# EAGLE board Arduino Portable (EAGLE 5.11)
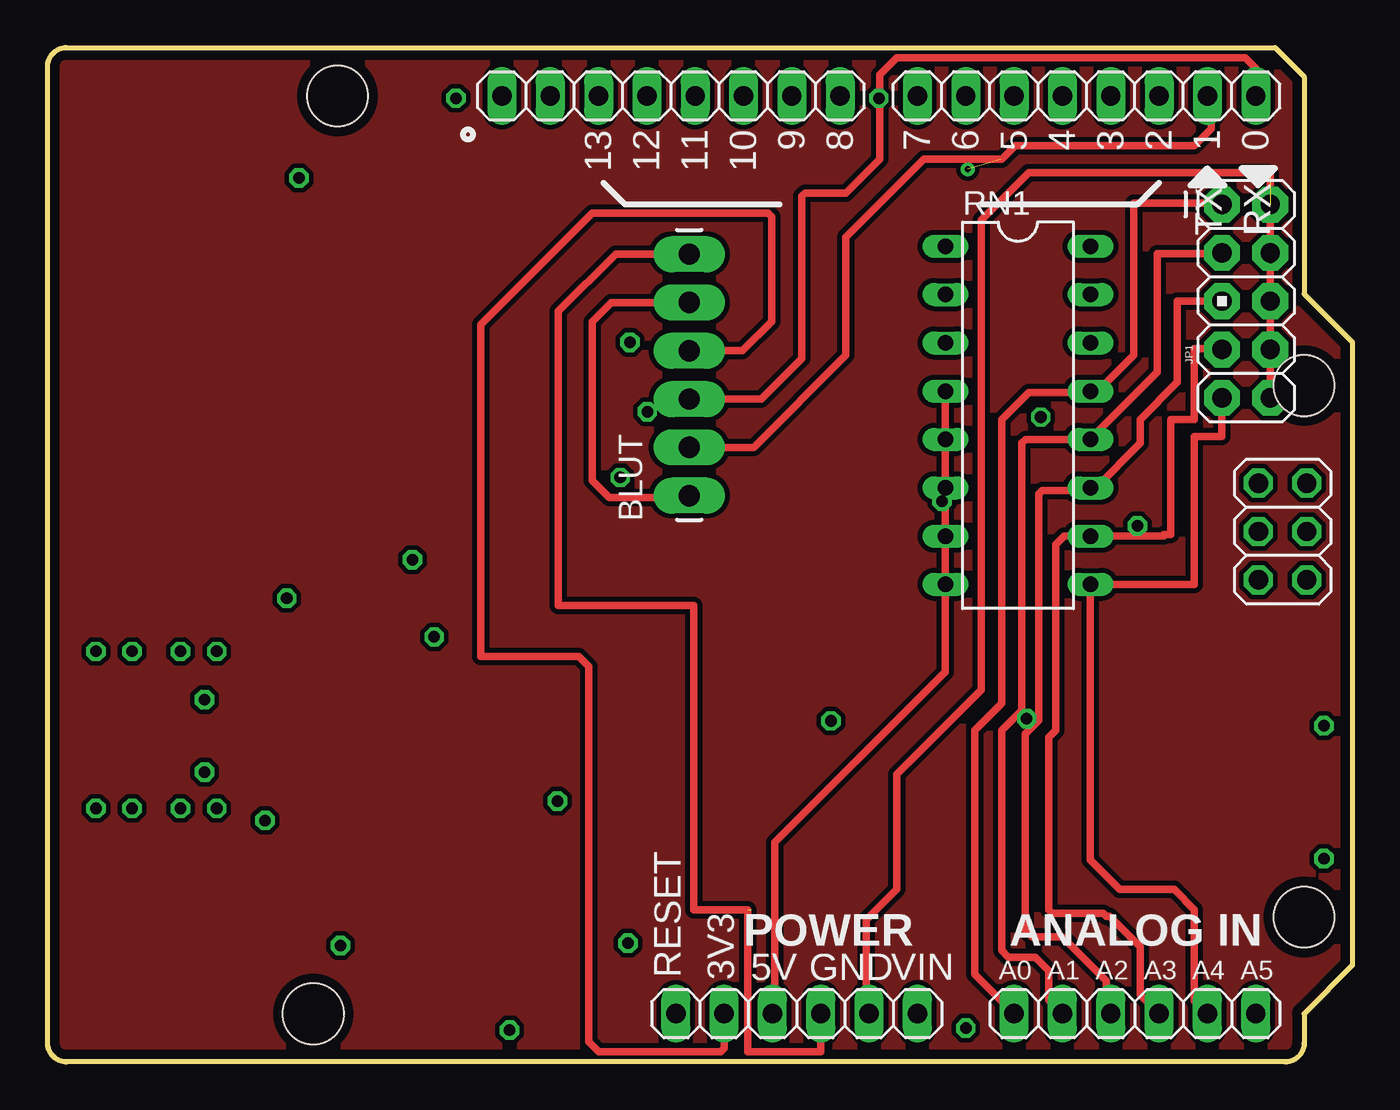
[diagram p0: board, top side]
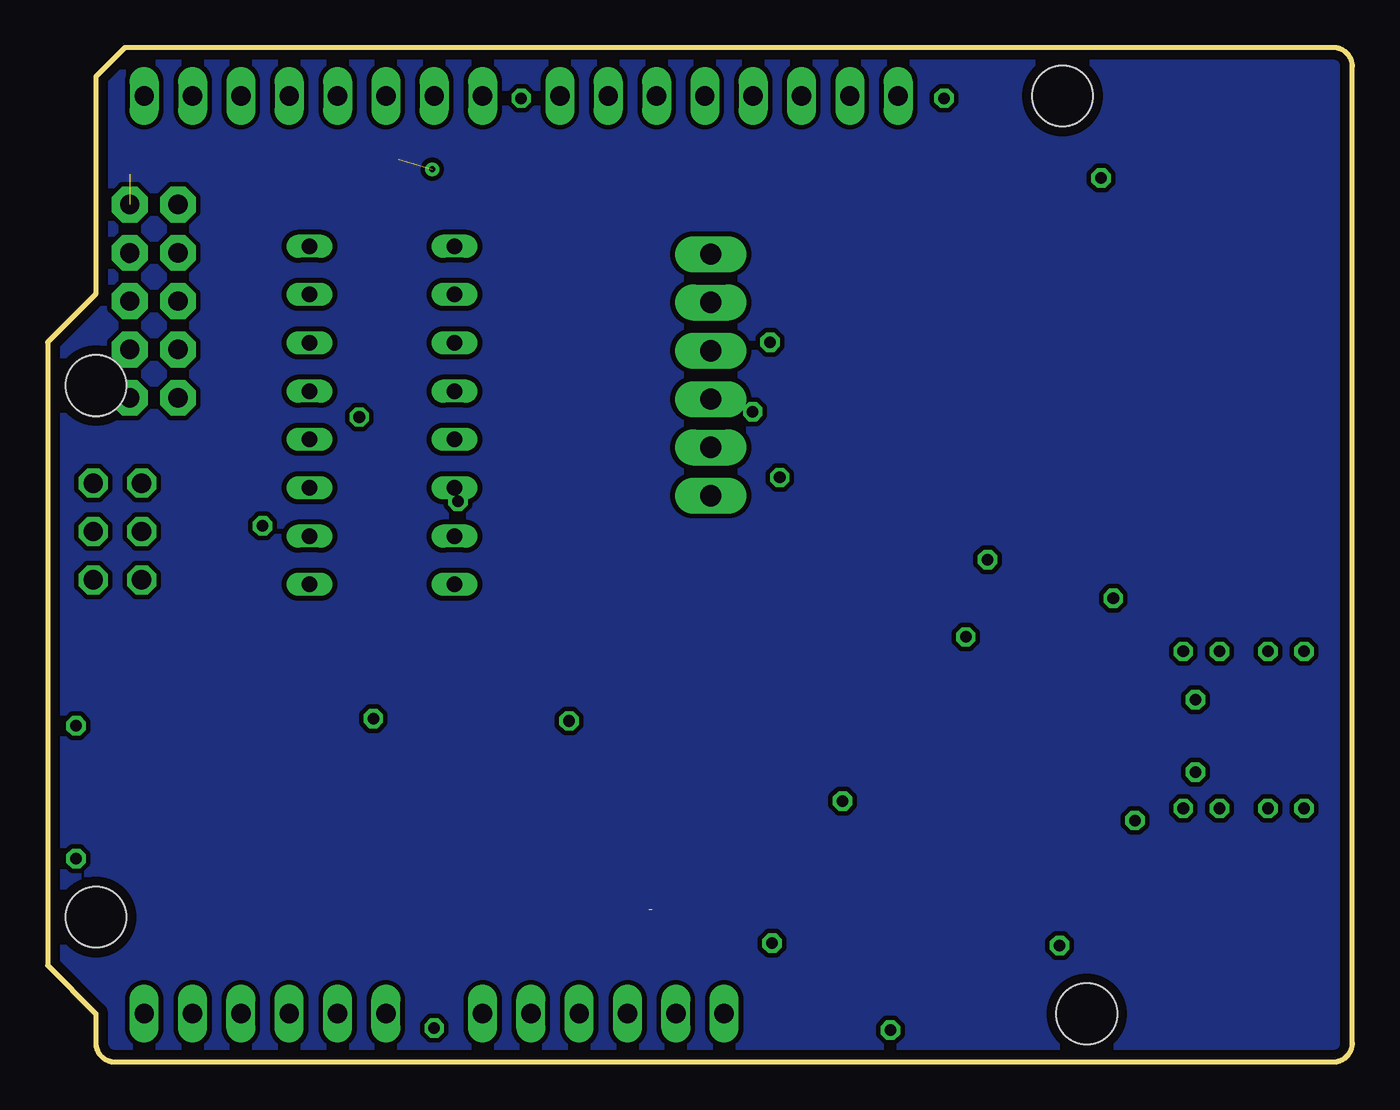
[diagram p1: board, bottom side, seen from below]

Size 68.58 x 53.34 mm. Coordinates in mm from the lower left corner, seen from the top.
Outline: 64.52,53.34 66.04,51.82 66.04,40.39 68.58,37.85 68.58,5.08 66.04,2.54 66.04,1 arc-90 65.04,0 1,0 arc-90 0,1 0,52.34 arc-90 1,53.34 64.52,53.34
Copper layers (1*16): Top 0.035mm / dielectric 1.5mm / Bottom 0.035mm
Design rules "ArduinoDEF": minimum track width 6mil, minimum drill 12mil, track to track 6mil, track to pad 6mil, pad to pad 6mil, via to via 6mil, smd to smd 6mil, copper to edge 20mil, drill to drill 6mil, minimum pad ring 8mil, minimum via ring 8mil, stop-mask expansion 0mil, vias tented up to drill 0mil, thermal gap 10mil
Net classes: 0 default: width 0.254 mm, clearance 0.254 mm; 1 power: width 0.61 mm, drill 0.61 mm, clearance 0.254 mm; 2 gnd: width 0.305 mm, drill 0.559 mm, clearance 0.254 mm; 3 usbvcc: width 0.508 mm, drill 0.61 mm, clearance 0.254 mm; 4 aref: width 0.406 mm, drill 0.61 mm, clearance 0.254 mm
Holes 3.2 mm at 66.04,35.56 66.04,7.62 15.24,50.8 13.97,2.54
vRestrict: area 22.9,44.1 to 24.6,49.1; area 25.4,45.5 to 27.1,49.1; area 28.4,45.3 to 29.6,48.8; area 31,45.3 to 32.1,48.8; area 33.5,45.3 to 34.7,48.8; area 36.1,45.3 to 37.2,48.8; area 38.7,47.2 to 39.9,48.8; area 40.3,45.1 to 47.6,46.9; area 60.3,44.2 to 61.7,46.7; area 62.9,44.2 to 64.3,46.7; area 61.3,35.8 to 64.8,37.2; area 0.6,21.8 to 2,30.1; 14 more areas

## Footprints (pad centres in the part's own frame; a part is rotated, then mirrored left to right if it is on the bottom)
1X06 = drill 1.016 long: 1 -6.35,0; 2 -3.81,0; 3 -1.27,0; 4 1.27,0; 5 3.81,0; 6 6.35,0
1X06_LONGPADS = drill 1.118 pad 1.88 long: 1 0,0; 2 2.54,0; 3 5.08,0; 4 7.62,0; 5 10.16,0; 6 12.7,0
2X03 = drill 1.016 octagon: 1 -2.54,-1.27; 2 -2.54,1.27; 3 0,-1.27; 4 0,1.27; 5 2.54,-1.27; 6 2.54,1.27
1X08 = drill 1.016 long: 1 -8.89,0; 2 -6.35,0; 3 -3.81,0; 4 -1.27,0; 5 1.27,0; 6 3.81,0; 7 6.35,0; 8 8.89,0
AVR_ICSP = drill 1.016 pad 1.88 octagon: 1 -1.27,5.08; 2 1.27,5.08; 3 -1.27,2.54; 4 1.27,2.54; 5 -1.27,0; 6 1.27,0; 7 -1.27,-2.54; 8 1.27,-2.54; 9 -1.27,-5.08; 10 1.27,-5.08
DIL16 = drill 0.813 long: 1 -8.89,-3.81; 2 -6.35,-3.81; 3 -3.81,-3.81; 4 -1.27,-3.81; 5 1.27,-3.81; 6 3.81,-3.81; 7 6.35,-3.81; 8 8.89,-3.81; 9 8.89,3.81; 10 6.35,3.81; 11 3.81,3.81; 12 1.27,3.81; 13 -1.27,3.81; 14 -3.81,3.81; 15 -6.35,3.81; 16 -8.89,3.81

## Placement (x,y rotation side)
AD  [1X06]  57.15,2.54 0 top
BLUT  [1X06_LONGPADS]  33.73,29.77 90 top
ICSP  ICSP  [2X03]  64.91,27.89 270 top
IOH  [1X08]  32.77,50.8 180 top
IOL  [1X08]  54.61,50.8 180 top
JP1  M05X2PTH  [AVR_ICSP]  62.99,40.01 0 top
POWER  [1X06]  39.37,2.54 0 top
RN1  [DIL16]  51,34 270 top

## Library data of the parts
AD ICSP IOH IOL POWER = pinhead
BLUT JP1 = SparkFun
RN1 = resistor-dil; OC_FARNELL: unknown; OC_NEWARK: unknown

## Nets
N$1: BLUT.1 BLUT.5
N$6: BLUT.6 POWER.4
N$7: BLUT.4 POWER.2
N$8: BLUT.3 IOL.1
N$9: BLUT.2 IOL.2
N$10: JP1.2 JP1.10 POWER.5
N$11: AD.1 JP1.1 RN1.13
N$12: POWER.3 RN1.4 RN1.8
N$13: AD.2 JP1.3 RN1.12
N$14: AD.3 JP1.5 RN1.11
N$16: AD.4 JP1.7 RN1.10
N$17: AD.5 JP1.9 RN1.9

## Tracks (layer width: path | path; a pad name or v marks a point on that pad's centre or on a via)
+5V  (via drill 0.61)
  other vias: 2.54,13.34
GND  (via drill 0.61)
  other vias: 15.39,6.12 24.28,1.68 11.43,12.7 12.57,24.38 30.51,6.25 26.8,13.72 20.32,22.35 19.18,26.42 48.26,1.78 41.17,17.93 30.1,30.73 31.52,34.19 30.61,37.85 51.46,18.06 21.46,50.67 52.2,33.91 47.02,29.49 67.08,10.69 67.08,17.68 57.28,28.19 43.69,50.67
N$1
  Top 0.406: BLUT.5 29.62,39.94 28.63,38.94 28.63,30.58 29.52,29.69 33.64,29.69 BLUT.1
N$2  (via drill 0.61)
  other vias: 13.21,46.48
N$3  (via drill 0.61)
  other vias: 4.45,21.59
N$4  (via drill 0.61)
  other vias: 2.54,21.59
N$5  (via drill 0.61)
  other vias: 64.29,42.32
N$6  (1 unrouted)
  Top 0.406: BLUT.6 29.85,42.48 26.85,39.47 26.85,24 33.96,24 33.96,8 36.8,8 36.8,0.53 40.64,0.53 POWER.4
N$7
  Top 0.406: BLUT.4 36.51,37.4 38.05,38.94 38.05,44.45 37.87,44.63 28.63,44.63 22.76,38.76 22.76,21.34 27.91,21.34 28.45,20.8 28.45,1.07 28.98,0.53 35.38,0.53 35.56,0.71 POWER.2
N$8
  Top 0.406: IOL.1 63.5,52.25 62.94,52.81 44.63,52.81 43.74,51.92 43.74,47.47 41.96,45.7 39.83,45.7 39.65,45.52 39.65,36.98 37.52,34.85 BLUT.3
N$9  (via drill 0.3)  (1 unrouted)
  Top 0.406: BLUT.2 37.12,32.31 41.96,37.16 41.96,43.38 46.05,47.47 50.14,47.47 50.85,48.18 60.27,48.18 61.16,49.07 61.16,50.6 IOL.2
  other vias: 48.36,46.94
N$10  (1 unrouted)
  Top 0.406: JP1.10 64.26,46.69 64.19,46.76 51.56,46.76 49.07,44.27 49.07,19.56 44.63,15.11 44.63,9.07 43.03,7.47 43.03,2.69 POWER.5
N$11
  Top 0.406: JP1.1 61.65,45.16 57.07,45.16 57.07,37.16 55.18,35.27 RN1.13 54.74,35.2 51.56,35.2 50.14,33.78 50.14,18.85 48.72,17.42 48.72,4.62 AD.1
N$12
  Top 0.406: RN1.4 RN1.8 47.19,20.52 38.23,11.56 38.23,2.67 POWER.3
N$13
  Top 0.406: JP1.3 61.67,42.49 58.32,42.49 58.32,36.27 54.81,32.76 RN1.12 51.4,32.73 51.21,32.54 51.21,18.49 50.14,17.42 50.14,5.87 50.49,5.51 51.92,5.51 52.63,4.8 52.63,3.25 AD.2
N$14
  Top 0.406: AD.3 55.65,2.77 55.65,4.27 53.34,6.58 51.74,6.58 51.38,6.93 51.38,17.25 52.09,17.96 52.09,29.87 52.27,30.05 54.67,30.05 RN1.11 55.08,30.19 57.43,32.54 57.43,33.78 59.38,35.74 59.38,40.01 JP1.5
N$15  (via drill 0.61)
  other vias: 6.99,21.59
N$16
  Top 0.406: AD.4 57.43,3.53 57.43,6.04 55.83,7.64 55.65,7.64 55.47,7.82 52.81,7.82 52.63,8 52.63,17.07 52.98,17.42 52.98,27.2 53.43,27.65 RN1.10 58.67,27.65 58.67,27.74 59.03,27.74 59.03,33.78 60.27,33.78 60.27,37.52 61.72,37.52 JP1.7
N$17
  Top 0.406: AD.5 60.27,3.23 60.27,8 59.21,9.07 56.36,9.07 54.81,10.62 RN1.9 60.27,25.11 60.27,32.89 61.72,32.89 JP1.9
N$18  (via drill 0.61)
  other vias: 8.89,21.59
N$19  (via drill 0.61)
  other vias: 8.26,19.05
N$20  (via drill 0.61)
  other vias: 8.26,15.24
N$21  (via drill 0.61)
  other vias: 8.89,13.34
N$22  (via drill 0.61)
  other vias: 6.99,13.34
N$23  (via drill 0.61)
  other vias: 4.45,13.34
N$24
  pour Top: -0.18,0 -0.18,52.81 0.89,53.87 64.54,53.87 66.5,51.92 66.5,40.54 68.81,38.23 68.81,4.98 66.14,2.31 66.14,0.36 66.14,0.18 65.61,-0.36 0.36,-0.36 -0.18,0.18
N$25
  pour Bottom: 0,0 0,52.98 0.89,53.87 64.72,53.87 66.67,51.92 66.67,40.72 66.5,40.54 68.99,38.05 68.99,4.98 66.32,2.31 66.32,0.18 65.61,-0.53 0.36,-0.53 -0.18,0

## Text on the board
tPlace: 13 | 12 | 11 | 10 | 9 | 8 | 7 | 6 | 5 | 4 | 3 | 2 | 1 | 0
tNames: TX | RX | ANALOG IN | RESET | 3V3 | 5V | GND | VIN | A0 | A1 | A2 | A3 | A4 | A5
ReferenceLC: L | TX | RX | PC1 | PC2
214bmp: D:/SmartProjects/Snc/a4_bn_logo2.bmp